# EAGLE board control_boardv4 (EAGLE 9.5.2)
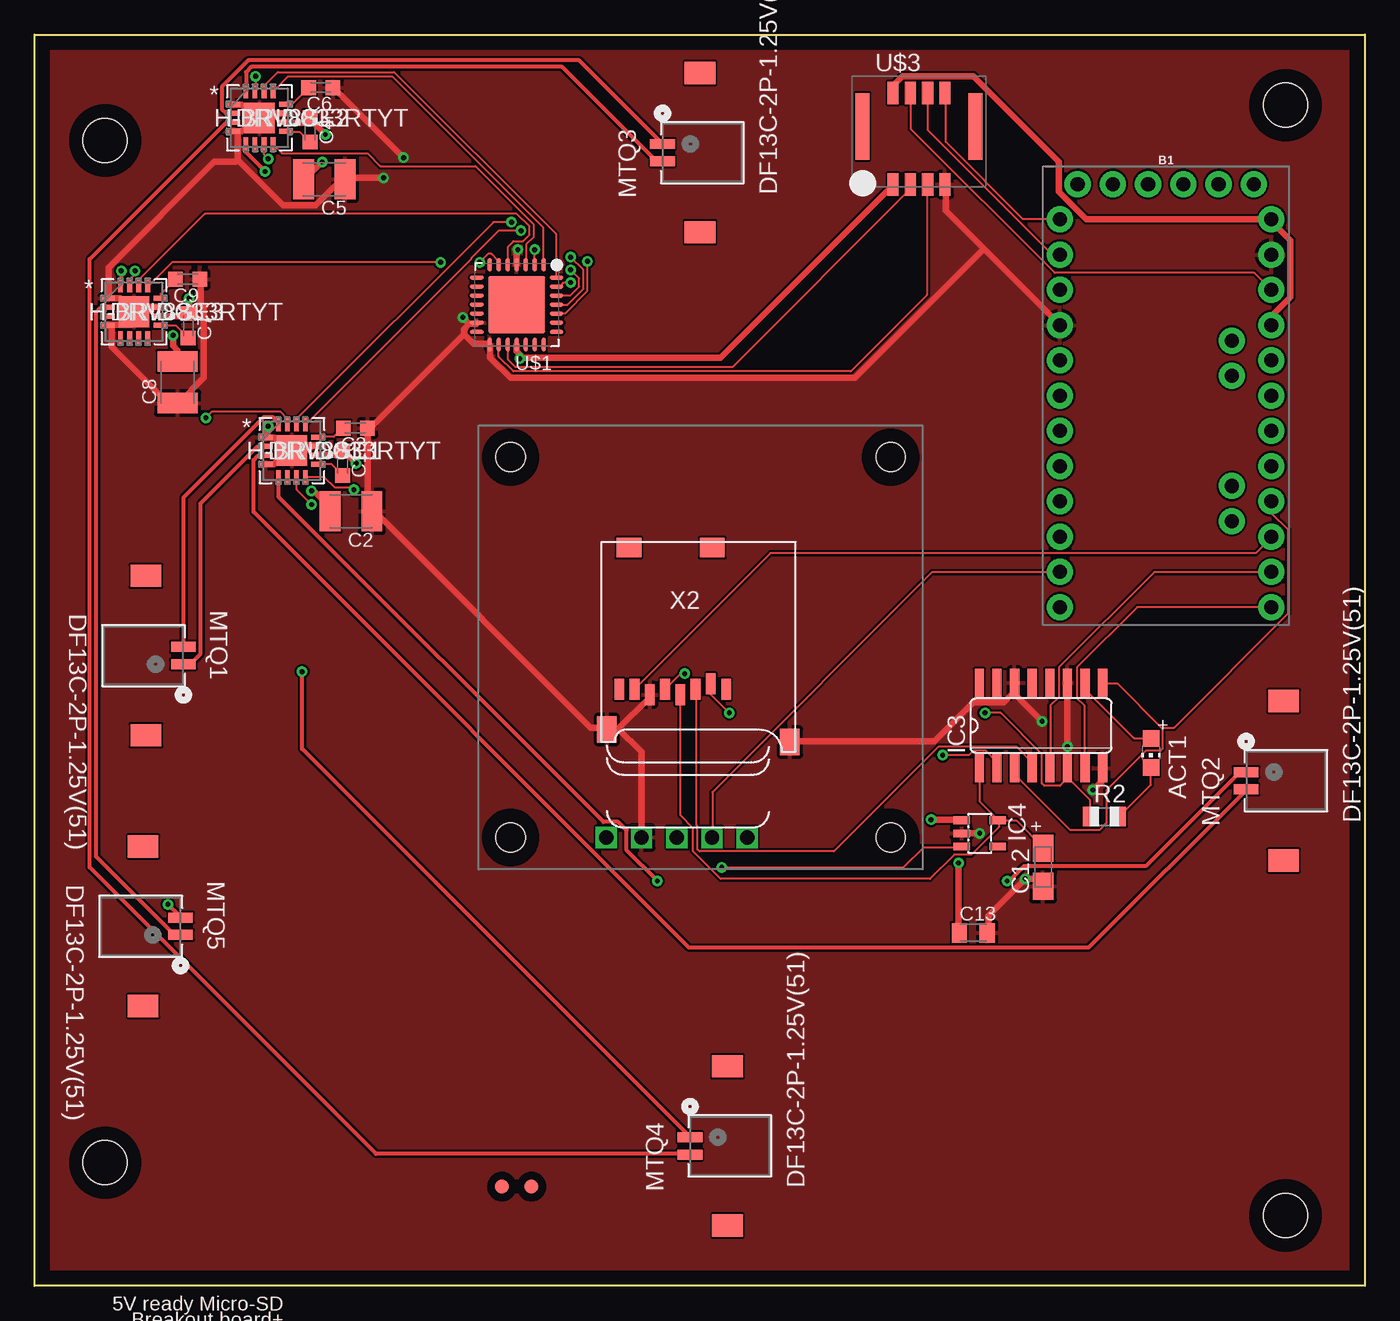
[diagram p0: board, top side]
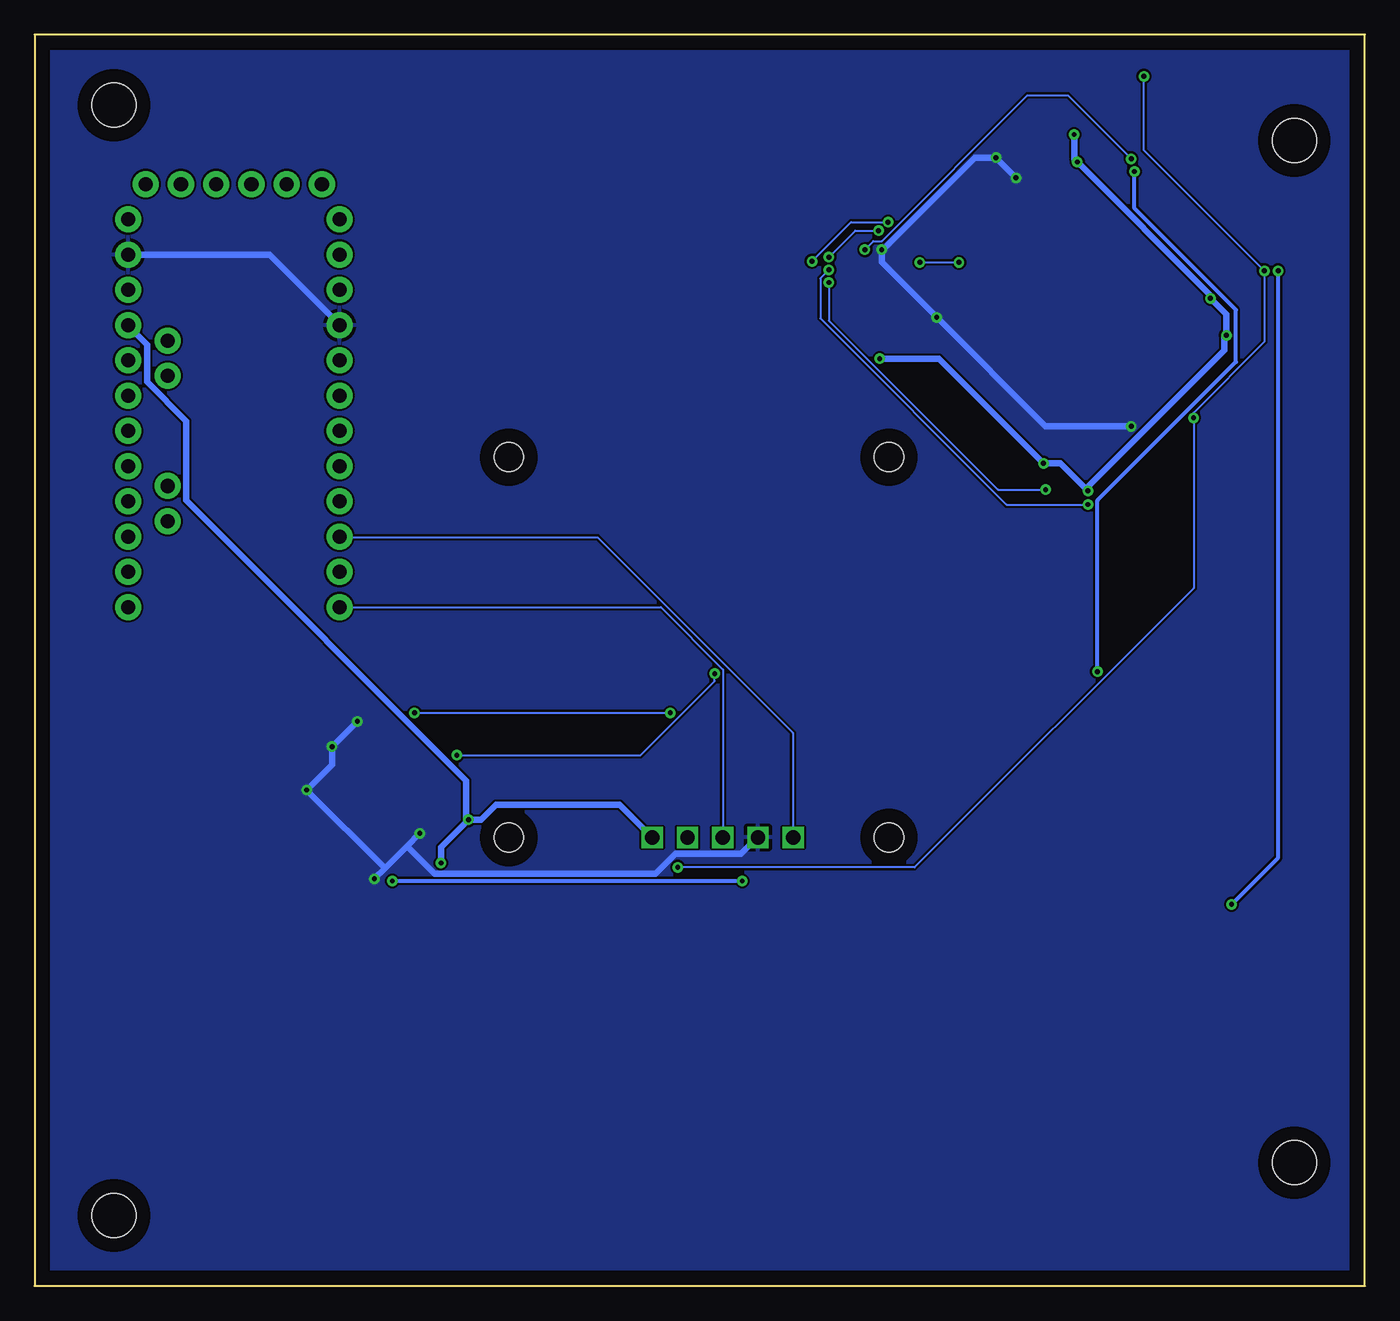
[diagram p1: board, bottom side, seen from below]

Size 95.89 x 90.17 mm. Coordinates in mm from the lower left corner, seen from the top.
Outline: 0,80 0,0
Outline: 0,0 0,90.17 95.89,90.17 95.89,0 0,0
Copper layers (1*16): Top 0.035mm / dielectric 1.5mm / Bottom 0.035mm
Design rules "default": minimum track width 6mil, minimum drill 0.35mm, track to track 6mil, track to pad 6mil, pad to pad 6mil, via to via 6mil, smd to smd 6mil, copper to edge 40mil, drill to drill 6mil, minimum pad ring 10mil, minimum via ring 8mil, stop-mask expansion 4mil, vias tented up to drill 0mil, thermal gap 10mil
Net classes: 0 default: width 0.152 mm; 1 New Class: width 0.457 mm; 2 MTQs: width 0.305 mm
Holes 3.17 mm at 5.08,82.55 5.08,8.89 90.17,5.08 90.17,85.09

## Footprints (pad centres in the part's own frame; a part is rotated, then mirrored left to right if it is on the bottom)
CHIP-LED0805 = smd 1.2 x 1.2: A 0,-1.05; C 0,1.05
ARDUINO_PRO_MINI = drill 1.016 pad 1.88: 1 -7.62,12.7; 2 -7.62,10.16; 3 -7.62,7.62; 4 -7.62,5.08; 5 -7.62,2.54; 6 -7.62,0; 7 -7.62,-2.54; 8 -7.62,-5.08; 9 -7.62,-7.62; 10 -7.62,-10.16; 11 -7.62,-12.7; 12 -7.62,-15.24; 13 7.62,-15.24; 14 7.62,-12.7; 15 7.62,-10.16; 16 7.62,-7.62; 17 7.62,-5.08; 18 7.62,-2.54; 19 7.62,0; 20 7.62,2.54; 21 7.62,5.08; 22 7.62,7.62; 23 7.62,10.16; 24 7.62,12.7; A4 4.763,1.429; A5 4.763,3.969; A6 4.763,-9.049; A7 4.763,-6.509; BLK -6.35,15.24; GND -3.81,15.24; GRN 6.35,15.24; RXI 1.27,15.24; TXO 3.81,15.24; VCC -1.27,15.24
C0603K = smd 1.05 x 1.08: 1 -0.875,0; 2 0.875,0
C1210K = smd 1.5 x 2.9: 1 -1.5,0; 2 1.5,0
A/3216-18R = smd 1.95 x 1.5: + 1.375,0; - -1.375,0
C0805K = smd 1.1 x 1.4: 1 -1,0; 2 1,0
RTY16 = smd 1 x 0.35: 1 -1.9,0.975; 2 -1.9,0.325; 3 -1.9,-0.325; 4 -1.9,-0.975; 9 1.9,-0.975; 10 1.9,-0.325; 11 1.9,0.325; 12 1.9,0.975 | smd 0.35 x 1: 5 -0.975,-1.9; 6 -0.325,-1.9; 7 0.325,-1.9; 8 0.975,-1.9; 13 0.975,1.9; 14 0.325,1.9; 15 -0.325,1.9; 16 -0.975,1.9 | smd 2.2 x 2.2: 17 0,0 | smd 0.3 x 0.3: V -0.394,-0.394
SO16 = smd 0.66 x 2.032: 1 -4.445,-3.073; 2 -3.175,-3.073; 3 -1.905,-3.073; 4 -0.635,-3.073; 5 0.635,-3.073; 6 1.905,-3.073; 7 3.175,-3.073; 8 4.445,-3.073; 9 4.445,3.073; 10 3.175,3.073; 11 1.905,3.073; 12 0.635,3.073; 13 -0.635,3.073; 14 -1.905,3.073; 15 -3.175,3.073; 16 -4.445,3.073
SOT23-5L = smd 0.55 x 1.2: 1 -0.95,-1.3; 2 0,-1.3; 3 0.95,-1.3; 4 0.95,1.3; 5 -0.95,1.3
CON2_1X2_U_DF13 = smd 0.711 x 1.778: 1 0,0; 2 -1.25,0 | smd 1.6 x 2.21: 3 -6.365,-2.7; 5 5.115,-2.7
R0805 = smd 1.1 x 1.4: 1 -1,0; 2 1,0
HVQFN28 = smd 1 x 0.3: 1 -2.875,1.95; 2 -2.875,1.3; 3 -2.875,0.65; 4 -2.875,0; 5 -2.875,-0.65; 6 -2.875,-1.3; 7 -2.875,-1.95; 15 2.875,-1.95; 16 2.875,-1.3; 17 2.875,-0.65; 18 2.875,0; 19 2.875,0.65; 20 2.875,1.3; 21 2.875,1.95 | smd 0.3 x 1: 8 -1.95,-2.875; 9 -1.3,-2.875; 10 -0.65,-2.875; 11 0,-2.875; 12 0.65,-2.875; 13 1.3,-2.875; 14 1.95,-2.875; 22 1.95,2.875; 23 1.3,2.875; 24 0.65,2.875; 25 0,2.875; 26 -0.65,2.875; 27 -1.3,2.875; 28 -1.95,2.875 | smd 4.1 x 4.1: GND 0,0
UCAM-III = drill 1.02 square: 1 19.36,2.3; 2 16.82,2.3; 3 14.28,2.3; 4 11.74,2.3; 5 9.2,2.3 | hole 2.1: 2.3,2.3; 29.7,2.3; 29.7,29.7; 2.3,29.7
MOLEX_MICRO_LOCK_PLUS_8 = smd 0.8 x 1.6: 1 0,-0.8; 2 1.25,-0.8; 3 2.5,-0.8; 4 3.75,-0.8; 5 3.75,-7.39; 6 2.5,-7.39; 7 1.25,-7.39; 8 0,-7.39 | smd 1 x 4.8: 9 5.95,-3.2; 10 -2.2,-3.2
FIDUCIAL_1MM = smd 1 x 1: 1 0,0
MICROSD = smd 0.7 x 1.5: 1 9,-10.64; 2 7.9,-10.24; 3 6.8,-10.64; 4 5.7,-11.04; 5 4.6,-10.64; 6 3.5,-11.04; 7 2.4,-10.64; 8 1.3,-10.64 | smd 1.8 x 1.4: CD1 2,-0.44; CD2 8,-0.44 | smd 1.4 x 1.9: MT1 0.4,-13.54; MT2 13.6,-14.44

## Placement (x,y rotation side)
ACT1  RED  [CHIP-LED0805]  80.47,38.4 180 top
B1  ARDUINO_PRO_MINI  [ARDUINO_PRO_MINI]  81.53,64.16 0 top
C1  0.01uF  [C0603K]  22.2,59.28 270 top
C2  10uF  [C1210K]  22.81,55.83 180 top
C3  2.2uF  [C0603K]  23.11,61.82 180 top
C4  0.01uF  [C0603K]  19.86,83.31 270 top
C5  10uF  [C1210K]  20.88,79.76 180 top
C6  2.2uF  [C0603K]  20.62,86.36 180 top
C7  0.01uF  [C0603K]  11.07,69.19 270 top
C8  10uF  [C1210K]  10.31,65.13 90 top
C9  2.2uF  [C0603K]  11.02,72.54 180 top
C12  10uF/10V  [A/3216-18R]  72.69,30.18 90 top
C13  0.1uF  [C0805K]  67.67,25.45 0 top
H-BRIDGE1  DRV8833RTYT  [RTY16]  18.54,60.2 0 top
H-BRIDGE2  DRV8833RTYT  [RTY16]  16.21,84.18 0 top
H-BRIDGE3  DRV8833RTYT  [RTY16]  7.16,70.21 0 top
IC3  4050D  [SO16]  72.54,40.39 0 top
IC4  LP298XS  [SOT23-5L]  68.12,32.61 270 top
MTQ1  DF13C-2P-1.25V(51)  [CON2_1X2_U_DF13]  10.72,44.81 270 top
MTQ2  DF13C-2P-1.25V(51)  [CON2_1X2_U_DF13]  87.33,37.03 90 top
MTQ3  DF13C-2P-1.25V(51)  [CON2_1X2_U_DF13]  45.26,82.3 90 top
MTQ4  DF13C-2P-1.25V(51)  [CON2_1X2_U_DF13]  47.24,10.72 90 top
MTQ5  DF13C-2P-1.25V(51)  [CON2_1X2_U_DF13]  10.52,25.3 270 top
R2  1K  [R0805]  77.11,33.83 0 top
U$1  PCA9685BS  [HVQFN28]  34.75,70.71 180 top
U$2  UCAM-III  [UCAM-III]  32,30.02 0 top
U$3  MOLEX_MICRO_LOCK_PLUS_8  [MOLEX_MICRO_LOCK_PLUS_8]  61.87,86.77 0 top
U$6  FIDUCIAL  [FIDUCIAL_1MM]  33.68,7.16 0 top
U$7  FIDUCIAL  [FIDUCIAL_1MM]  35.81,7.16 0 top
X2  MICROSD  [MICROSD]  40.84,53.64 0 top

## Library data of the parts
ACT1 C12 C13 IC4 R2 U$6 U$7 X2 = adafruit
B1 = SparkFun-Boards
C1-C9 = rcl; SPICEPREFIX: C
H-BRIDGE1-H-BRIDGE3 = myparts; BUILT_BY: EMA_UL_Team; MANUFACTURER: Texas Instruments; MANUFACTURER_PART_NUMBER: DRV8833RTYT; VENDOR: Texas Instruments
IC3 = 40xx
MTQ1-MTQ5 = myparts; BUILT_BY: EMA_UL_Team; MANUFACTURER_PART_NUMBER: DF13C-2P-1.25V(51); VENDOR: Hirose
U$1-U$3 = myparts

## Nets
5V_1 [New Class]: C1.1 C2.2 C4.1 C5.2 C7.1 C8.2 H-BRIDGE1.10 H-BRIDGE2.10 H-BRIDGE3.10 U$1.25 U$3.8
5V_2 [New Class]: B1.21 B1.24 C13.1 IC4.1 U$2.1 U$3.1
+3V3: C12.+ IC3.1 IC4.5 X2.4
CD: X2.CD1
CLK: B1.16 IC3.3 IC3.9
CS: B1.13 IC3.7
DI: B1.14 IC3.5
DO: B1.15 X2.7
GND [New Class]: B1.4 B1.23 C2.1 C3.1 C5.1 C6.1 C8.1 C9.1 C12.- C13.2 H-BRIDGE1.1 H-BRIDGE1.4 H-BRIDGE1.11 H-BRIDGE1.17 H-BRIDGE2.1 H-BRIDGE2.4 H-BRIDGE2.11 H-BRIDGE2.17 H-BRIDGE3.1 H-BRIDGE3.4 H-BRIDGE3.11 H-BRIDGE3.17 IC3.8 IC3.11 IC3.14 IC4.2 U$1.11 U$1.20 U$1.22 U$2.4 U$3.5 X2.6 X2.MT1 X2.MT2
MTQ1_A: H-BRIDGE1.14 U$1.3
MTQ1_B: H-BRIDGE1.13 U$1.4
MTQ2_A: H-BRIDGE1.7 U$1.5
MTQ2_B: H-BRIDGE1.8 U$1.6
MTQ3_A: H-BRIDGE2.14 U$1.7
MTQ3_B: H-BRIDGE2.13 U$1.8
MTQ4_A: H-BRIDGE2.7 U$1.9
MTQ4_B: H-BRIDGE2.8 U$1.10
MTQ5_A: H-BRIDGE3.14 U$1.12
MTQ5_B: H-BRIDGE3.13 U$1.13
N$1 [MTQs]: H-BRIDGE2.16 MTQ3.2
N$2: C3.2 H-BRIDGE1.12
N$3 [MTQs]: H-BRIDGE1.2 MTQ1.1
N$4 [MTQs]: H-BRIDGE1.16 MTQ1.2
N$5 [MTQs]: H-BRIDGE1.5 MTQ2.1
N$6 [MTQs]: H-BRIDGE1.3 MTQ2.2
N$7: C1.2 H-BRIDGE1.9
N$8 [MTQs]: H-BRIDGE2.5 MTQ4.1
N$9 [MTQs]: H-BRIDGE2.3 MTQ4.2
N$10: C6.2 H-BRIDGE2.12
N$11: C4.2 H-BRIDGE2.9
N$12 [MTQs]: H-BRIDGE2.2 MTQ3.1
N$13 [MTQs]: H-BRIDGE3.16 MTQ5.2
N$16: C9.2 H-BRIDGE3.12
N$17: C7.2 H-BRIDGE3.9
N$18 [MTQs]: H-BRIDGE3.2 MTQ5.1
N$22: ACT1.A IC3.10
N$23: IC3.2 X2.5
N$24: IC3.6 R2.1 X2.2
N$25: ACT1.C R2.2
N$26: IC3.4 X2.3
N$27: B1.10 U$2.5
RST: B1.22 U$3.2
RX: B1.12 U$2.3
RXI: B1.2 U$3.3
SCL: U$1.23 U$3.6
SDA: U$1.24 U$3.7
TX: B1.11 U$2.2
TXO: B1.1 U$3.4
VCC: H-BRIDGE1.15 H-BRIDGE2.15 H-BRIDGE3.15 IC4.3

## Tracks (layer width: path | path; a pad name or v marks a point on that pad's centre or on a via)
5V_1  (via drill 0.35)
  Top 0.457: U$1.25 34.75,67.36 35.13,66.98 | 35.13,66.98 35.2,66.9 49.45,66.9 61.87,79.32 U$3.8 | H-BRIDGE1.10 20.5,59.89 21.95,59.89 22.17,60.12 C1.1 22.33,59.97 22.48,59.97 v23.16,59.28 | v19.96,57.3 20.12,57.3 21.26,56.16 21.26,55.85 C2.2 | H-BRIDGE3.10 10.9,69.88 11.05,70.03 C7.1 11.12,70.26 v11.12,71.17 | H-BRIDGE2.10 18.14,83.82 19.51,83.82 19.81,84.12 C4.1 19.96,83.97 v20.95,82.98 | v20.73,81 19.43,79.7 C5.2 | v9.98,68.5 9.98,67.74 10.29,67.44 10.29,66.67 C8.2 | v34.98,66.83 35.13,66.98
  Bottom 0.457: v20.95,82.98 20.95,81.23 v20.73,81 11.12,71.4 v11.12,71.17 9.98,70.03 v9.98,68.5 10.13,68.35 10.13,67.44 19.96,57.61 v19.96,57.3 21.95,59.28 v23.16,59.28 30.71,66.83 v34.98,66.83
5V_2  (via drill 0.35)
  Top 0.457: v64.62,33.6 66.75,33.6 IC4.1 | v66.6,30.48 66.6,25.45 C13.1 | U$3.1 61.87,86.49 62.56,87.17 67.67,87.17 73.84,81 73.84,78.87 75.82,76.89 89.15,76.89 B1.24 89.23,76.66 90.53,75.36 90.53,71.25 89.15,69.88 B1.21
  Bottom 0.457: v64.62,33.6 63.7,33.6 62.64,34.67 53.72,34.67 51.44,32.38 U$2.1 | v66.6,30.48 66.6,31.62 v64.62,33.6 | v64.62,33.6 64.77,33.76 64.77,36.42 84.96,56.62 84.96,62.33 87.78,65.15 87.78,67.82 89.15,69.19 B1.21
+3V3
  Top 0.152: IC4.5 69.49,33.53 70.79,33.53 72.69,31.62 C12.+ | X2.4 46.56,42.6 46.56,33.91 47.47,32.99 47.47,31.32 49.45,29.34 64.54,29.34 66.29,31.09 67.51,31.09 69.49,33.07 69.49,33.45 IC4.5 | IC3.1 68.12,37.26 68.12,34.9 69.42,33.6 IC4.5
CLK
  Top 0.152: IC3.3 70.64,36.88 74.68,32.84 76.73,32.84 77.27,33.38 77.27,35.74 80.09,38.56 81.15,38.56 81.31,38.71 81.31,40.16 81.27,40.2 | 81.27,40.2 78.03,43.43 77.04,43.43 IC3.9 | B1.16 89.15,55.7 90.37,54.48 90.37,48.46 82.14,40.23 81.31,40.23 81.27,40.2
CS
  Top 0.152: B1.13 79.48,48.92 75.13,44.58 75.13,42.37 75.67,41.83 75.67,37.34 IC3.7
DI
  Top 0.152: IC3.5 73.23,37.34 73.23,41.83 73.84,42.44 73.84,44.58 80.7,51.44 89.15,51.44 B1.14
DO
  Top 0.152: X2.7 43.28,43.05 53.03,52.81 88.01,52.81 89.15,53.95 B1.15
GND  (via drill 0.35)
  Top 0.457: X2.MT2 54.48,39.24 64.85,39.24 67.67,42.06 69.88,42.06 70.64,42.82 IC3.14 70.71,42.6 v72.62,40.69 | v68.12,32.61 IC4.2 | C12.- 72.16,29.34 v71.4,29.34 68.73,26.67 68.73,25.45 C13.2 | v76.28,35.74 76.96,36.42 76.96,37.26 IC3.8 | v74.45,38.86 IC3.11 | H-BRIDGE2.17 16.15,84.2 16,84.35 15.62,84.35 15.24,83.97 15.24,83.52 14.94,83.21 14.33,83.21 H-BRIDGE2.4 14.63,83.06 14.63,81.15 | H-BRIDGE2.1 14.33,85.11 14.94,85.11 15.54,84.51 H-BRIDGE2.17 | H-BRIDGE2.11 18.06,84.51 16.61,84.51 16.38,84.28 H-BRIDGE2.17 | 14.63,81.15 17.91,77.88 20.27,77.88 22.1,79.7 22.33,79.7 C5.1 22.55,79.86 v25.15,79.86 | H-BRIDGE3.17 7.16,70.18 7.32,70.03 7.32,69.57 7.01,69.27 5.33,69.27 H-BRIDGE3.4 5.56,69.11 5.56,67.67 9.53,63.7 10.13,63.7 C8.1 10.36,63.63 12.19,65.46 12.19,70.56 11.96,70.79 11.96,72.54 C9.1 | H-BRIDGE3.11 8.99,70.56 7.85,70.56 7.47,70.18 H-BRIDGE3.17 | 5.3,71.17 5.33,71.17 6.17,71.17 7.01,70.33 H-BRIDGE3.17 | 5.3,71.17 H-BRIDGE3.1 | 14.63,81.15 14.48,81 12.95,81 5.33,73.38 5.33,71.4 5.3,71.17 | 68.43,74.75 73.91,69.27 B1.4 | 68.43,74.75 65.68,77.5 65.68,79.32 U$3.5 | 42.06,40.16 44.27,42.37 44.27,42.6 X2.6 | 42.06,40.16 41.3,40.16 X2.MT1 41.07,40.23 40.08,40.23 24.54,55.78 C2.1 24.31,55.85 24,56.16 24,61.8 C3.1 24.16,61.95 24.31,61.95 30.94,68.58 | 42.06,40.16 43.74,38.48 43.74,32.38 U$2.4 | H-BRIDGE1.4 16.69,59.21 17.22,59.21 17.6,59.59 17.6,60.05 17.91,60.35 18.36,60.35 18.52,60.2 H-BRIDGE1.17 | H-BRIDGE1.17 17.91,60.5 17.3,61.11 16.69,61.11 H-BRIDGE1.1 16.76,61.34 16.76,61.87 v16.84,61.95 | H-BRIDGE1.11 20.42,60.58 19.05,60.58 18.75,60.27 H-BRIDGE1.17
  Top 0.457: 31.32,69.34 31.85,69.34 U$1.20 | 31.32,69.34 30.94,68.96 30.94,68.58 | 30.94,68.58 31.62,67.89 32.77,67.89 U$1.22 32.84,67.67 32.84,66.9 34.29,65.46 59.13,65.46 68.43,74.75 | U$1.11 34.75,74.6 v34.82,74.68 | 31.32,69.34 v30.86,69.8 | v26.59,81.31 21.57,86.33 C6.1
  Bottom 0.457: v71.4,29.34 70.64,30.1 | 70.64,30.1 69.04,31.7 | 69.04,31.7 v68.12,32.61 | 70.64,30.1 v76.28,35.74 74.45,37.57 v74.45,38.86 v72.62,40.69 | B1.23 89.15,74.3 78.94,74.3 73.91,69.27 B1.4 | v16.84,61.95 23.01,61.95 v30.86,69.8 34.82,73.76 v34.82,74.68 34.67,74.75 28.12,81.31 v26.59,81.31 v25.15,79.86 | 69.04,31.7 67.06,29.72 51.13,29.72 49.68,31.17 44.96,31.17 43.81,32.31 U$2.4
  pour Top: -2.74,92.66 100.89,92.66 101.04,92.51 101.04,-0.76 98.6,-3.2 -3.66,-3.2 -7.47,0.61 -7.47,87.93
  pour Bottom: -3.35,94.18 114.3,94.18 115.67,92.81 115.67,-10.06 110.49,-15.24 -1.83,-15.24 -9.14,-7.92 -9.14,88.39
MTQ1_A  (via drill 0.35)
  Top 0.152: v34.37,76.66 33.07,76.66 18.9,62.48 18.9,62.1 H-BRIDGE1.14 | v39.85,73.84 39.85,71.7 38.25,70.1 37.64,70.1 U$1.3
  Bottom 0.152: v34.37,76.66 37.03,76.66 v39.85,73.84
MTQ1_B  (via drill 0.35)
  Top 0.152: v35.05,76.05 33.45,76.05 31.47,74.07 31.47,73.99 19.58,62.1 H-BRIDGE1.13 | v38.63,74.14 39.55,73.23 39.55,71.86 38.41,70.71 U$1.4
  Bottom 0.152: v35.05,76.05 36.73,76.05 v38.63,74.14
MTQ2_A  (via drill 0.35)
  Top 0.152: v19.96,56.31 18.9,57.38 18.9,58.29 H-BRIDGE1.7 | v38.63,73.23 39.24,72.62 39.24,72.01 38.63,71.4 37.64,71.4 U$1.5
  Bottom 0.152: v19.96,56.31 25.83,56.31 39.24,69.72 39.24,72.62 v38.63,73.23
MTQ2_B  (via drill 0.35)
  Top 0.152: v23.01,57.38 22.86,57.53 21.64,57.53 20.88,58.29 19.58,58.29 H-BRIDGE1.8 | v38.63,72.31 38.18,72.31 37.95,72.08 37.64,72.08 U$1.6
  Bottom 0.152: v23.01,57.38 26.44,57.38 38.63,69.57 v38.63,72.31
MTQ3_A
  Top 0.152: U$1.7 37.57,72.69 37.57,75.82 25.91,87.48 17.53,87.48 16.54,86.49 16.54,86.11 H-BRIDGE2.14
MTQ3_B
  Top 0.152: U$1.8 36.65,73.61 36.65,76.28 25.76,87.17 18.29,87.17 17.22,86.11 H-BRIDGE2.13
MTQ4_A  (via drill 0.35)
  Top 0.152: v16.84,81.23 16.54,81.53 16.54,82.22 H-BRIDGE2.7 | v36.04,74.68 36.04,73.61 U$1.9
  Bottom 0.152: v16.84,81.23 21.41,85.8 24.31,85.8 34.82,75.29 35.43,75.29 v36.04,74.68
MTQ4_B
  Top 0.152: U$1.10 35.43,73.61 35.43,75.06 35.97,75.59 35.97,76.5 31.77,80.7 24.92,80.7 24,81.61 17.83,81.61 17.22,82.22 H-BRIDGE2.8
MTQ5_A
  Top 0.152: H-BRIDGE3.14 7.54,72.16 7.54,72.54 12.27,77.27 34.75,77.27 35.66,76.35 35.66,75.74 35.2,75.29 34.52,75.29 34.14,74.91 34.14,73.61 U$1.12
MTQ5_B  (via drill 0.35)
  Top 0.152: v29.26,73.76 9.91,73.76 8.31,72.16 8.15,72.16 H-BRIDGE3.13 | v32.08,73.76 32.69,74.37 32.92,74.37 33.38,73.91 33.38,73.61 U$1.13
  Bottom 0.152: v32.08,73.76 v29.26,73.76
N$1
  Top 0.305: H-BRIDGE2.16 15.24,86.11 15.24,87.48 15.62,87.86 38.02,87.86 44.81,81.08 45.26,81.08 MTQ3.2
N$2
  Top 0.152: H-BRIDGE1.12 20.5,61.19 21.57,61.19 22.17,61.8 C3.2
N$3
  Top 0.305: MTQ1.1 11.2,44.81 11.96,45.57 11.96,56.39 16.08,60.5 16.61,60.5 H-BRIDGE1.2
N$4
  Top 0.305: H-BRIDGE1.16 17.53,62.1 17.53,62.26 17.14,62.64 16.54,62.64 10.74,56.84 10.74,46.1 MTQ1.2
N$5  (via drill 0.35)
  Top 0.305: v44.88,29.18 42.67,31.39 42.67,32.84 42.06,33.45 41,33.45 17.6,56.84 17.6,58.29 H-BRIDGE1.5 | v70.1,29.18 70.26,29.18 71.32,30.25 80.09,30.25 86.87,37.03 MTQ2.1
  Bottom 0.305: v70.1,29.18 v44.88,29.18
N$6
  Top 0.305: H-BRIDGE1.3 16.61,59.82 16.08,59.82 15.77,59.51 15.77,55.78 47.17,24.38 75.97,24.38 87.33,35.74 MTQ2.2
N$7
  Top 0.152: H-BRIDGE1.9 20.5,59.21 21.41,59.21 22.17,58.45 C1.2
N$8  (via drill 0.35)
  Top 0.305: v16.61,80.31 15.24,81.69 15.24,82.22 H-BRIDGE2.5 | v19.28,44.27 19.28,38.71 47.24,10.74 MTQ4.1
  Bottom 0.305: v16.61,80.31 16.61,77.65 9.3,70.33 9.3,66.6 19.28,56.62 v19.28,44.27
N$9
  Top 0.305: H-BRIDGE2.3 14.25,83.82 13.79,83.82 3.96,73.99 3.96,30.18 24.61,9.53 47.24,9.53 MTQ4.2
N$10
  Top 0.152: H-BRIDGE2.12 18.14,85.19 18.59,85.19 19.74,86.33 C6.2
N$11
  Top 0.152: H-BRIDGE2.9 18.14,83.13 19.13,83.13 19.81,82.45 C4.2
N$12
  Top 0.305: MTQ3.1 39.24,88.32 15.39,88.32 13.49,86.41 13.49,84.81 13.79,84.51 14.25,84.51 H-BRIDGE2.2
N$13  (via drill 0.35)
  Top 0.305: v6.25,73.15 6.25,72.16 H-BRIDGE3.16 | v9.6,27.51 10.52,26.59 MTQ5.2
  Bottom 0.305: v6.25,73.15 6.25,30.86 v9.6,27.51
N$16
  Top 0.152: H-BRIDGE3.12 9.07,71.25 9.07,71.48 10.13,72.54 C9.2
N$17
  Top 0.152: H-BRIDGE3.9 9.07,69.19 10.21,69.19 11.05,68.35 C7.2
N$18
  Top 0.305: MTQ5.1 10.06,25.3 4.42,30.94 4.42,70.18 4.72,70.48 5.26,70.48 H-BRIDGE3.2
N$22
  Top 0.152: ACT1.A 80.47,39.47 79.25,39.47 75.74,42.98 75.74,43.43 IC3.10
N$23  (via drill 0.35)
  Top 0.152: X2.5 46.56,44.12 v46.86,44.12 | v65.46,38.25 67.36,38.25 67.67,38.56 68.58,38.56 69.34,37.8 69.34,37.34 IC3.2
  Bottom 0.152: v46.86,44.12 46.86,43.59 52.2,38.25 v65.46,38.25
N$24  (via drill 0.35)
  Top 0.152: R2.1 76.05,33.83 76.05,35.05 74.45,36.65 IC3.6 74.45,36.58 73.91,36.04 72.77,36.04 72.62,36.2 72.62,38.33 69.65,41.3 v68.5,41.3 | v50.06,41.3 48.77,42.6 48.77,43.36 X2.2
  Bottom 0.152: v68.5,41.3 v50.06,41.3
N$25
  Top 0.152: ACT1.C 80.47,36.12 78.18,33.83 R2.2
N$26
  Top 0.152: X2.3 47.7,42.98 47.7,33.22 47.78,33.15 47.78,31.47 47.93,31.32 57.61,31.32 65.15,38.86 70.79,38.86 71.86,37.8 71.86,37.34 IC3.4
N$27
  Bottom 0.152: U$2.5 41.22,32.38 41.22,39.85 55.32,53.95 73.91,53.95 B1.10
RST
  Top 0.152: B1.22 87.94,73 73.53,73 63.17,83.36 63.17,85.95 U$3.2
RX
  Bottom 0.152: B1.12 50.75,48.92 46.25,44.42 46.25,32.38 U$2.3
RXI
  Top 0.152: U$3.3 64.39,85.95 64.39,83.29 73.3,74.37 73.91,74.37 B1.2
SCL
  Top 0.152: U$1.23 33.45,67.82 33.45,66.98 34.52,65.91 58.83,65.91 64.31,71.4 64.31,79.32 U$3.6
SDA
  Top 0.152: U$1.24 34.14,67.82 34.14,66.75 34.67,66.22 50.29,66.22 63.09,79.02 63.09,79.32 U$3.7
TX
  Top 0.152: U$2.2 48.84,32.38 48.84,35.59 64.69,51.44 73.91,51.44 B1.11
TXO
  Top 0.152: U$3.4 65.68,85.95 65.68,82.45 71.25,76.89 73.91,76.89 B1.1
VCC  (via drill 0.35)
  Top 0.152: v12.34,62.56 12.8,63.02 17.68,63.02 18.21,62.48 H-BRIDGE1.15 | v7.24,73.15 7.24,72.92 6.86,72.54 6.86,72.16 H-BRIDGE3.15 | v15.93,87.17 15.93,86.11 H-BRIDGE2.15 | v49.53,30.18 62.64,30.18 64.08,31.62 66.75,31.62 IC4.3
  Bottom 0.152: v15.93,87.17 15.93,81.84 v7.24,73.15 7.24,68.05 12.34,62.94 v12.34,62.56 12.34,50.29 32.46,30.18 v49.53,30.18

## Text on the board
tPlace: 5V ready Micro-SD | Breakout board+ | adafruit.com